# Altium PCB A.SHELESTOV_MOD1.PcbDoc
Units mm, origin at the board's own origin, x right, y up, seen from the top; angles counter-clockwise.
Board outline 152.4 x 101.6 mm, 2 copper layers (Top Layer, Bottom Layer); 118 components, 99 nets, 495 pads, 0 vias.
Unrouted connection lines stored in the file: 263.
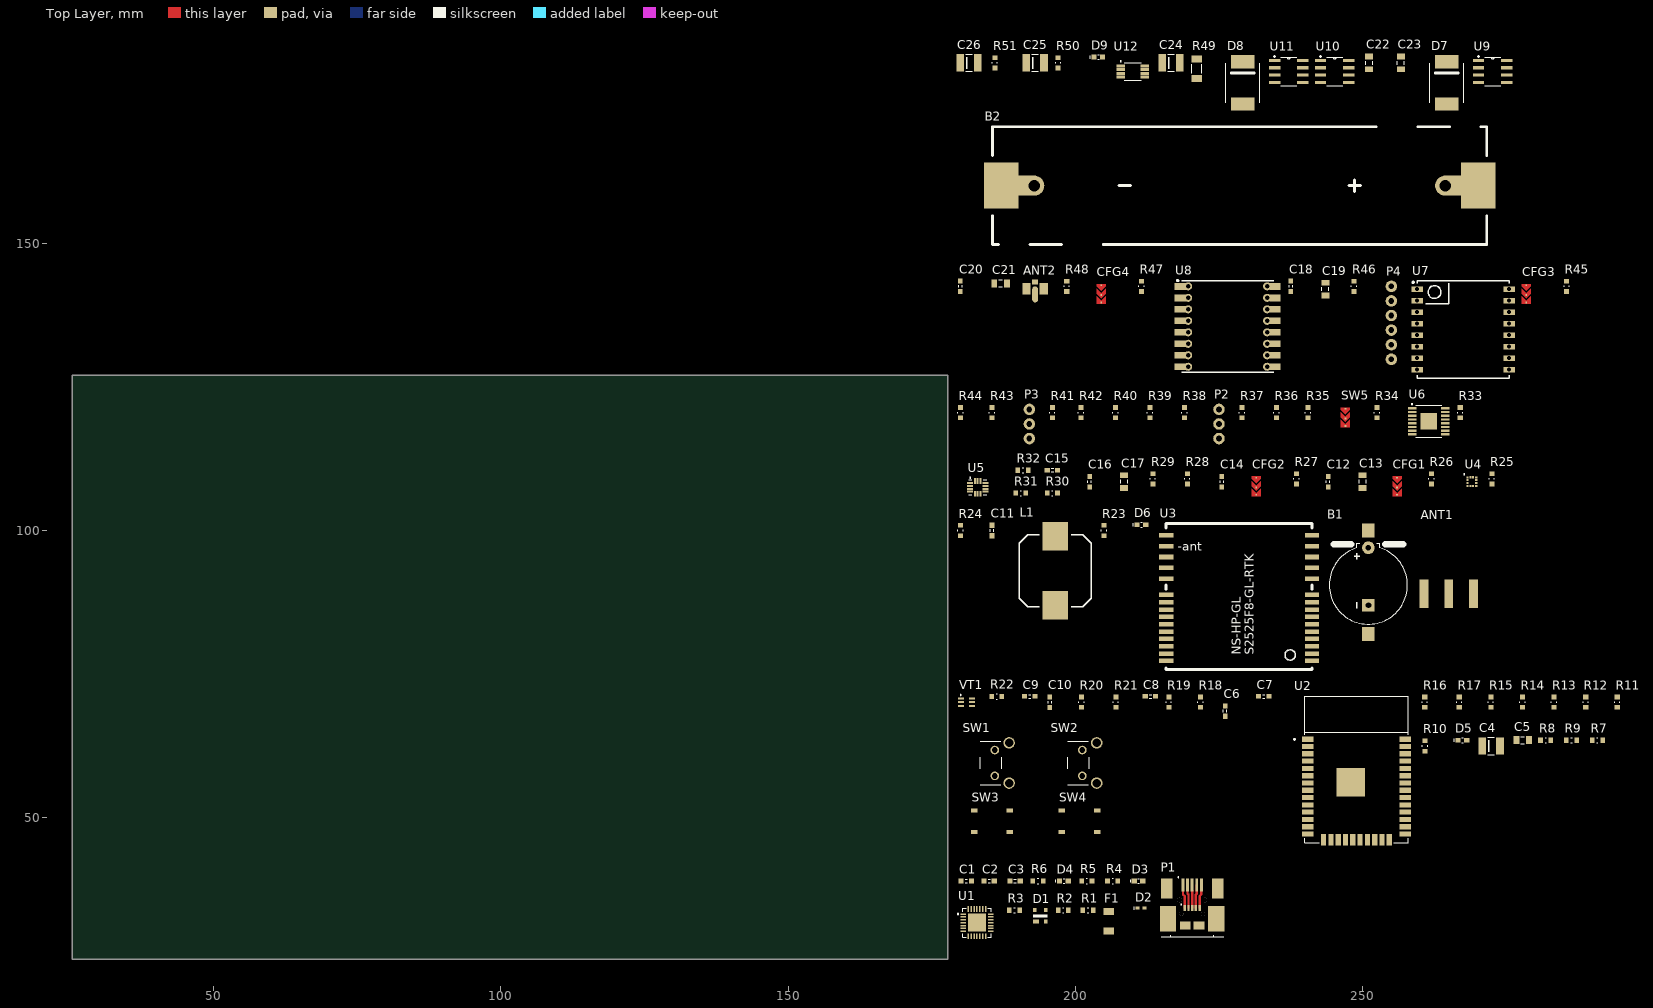
[diagram p0: Top Layer view]
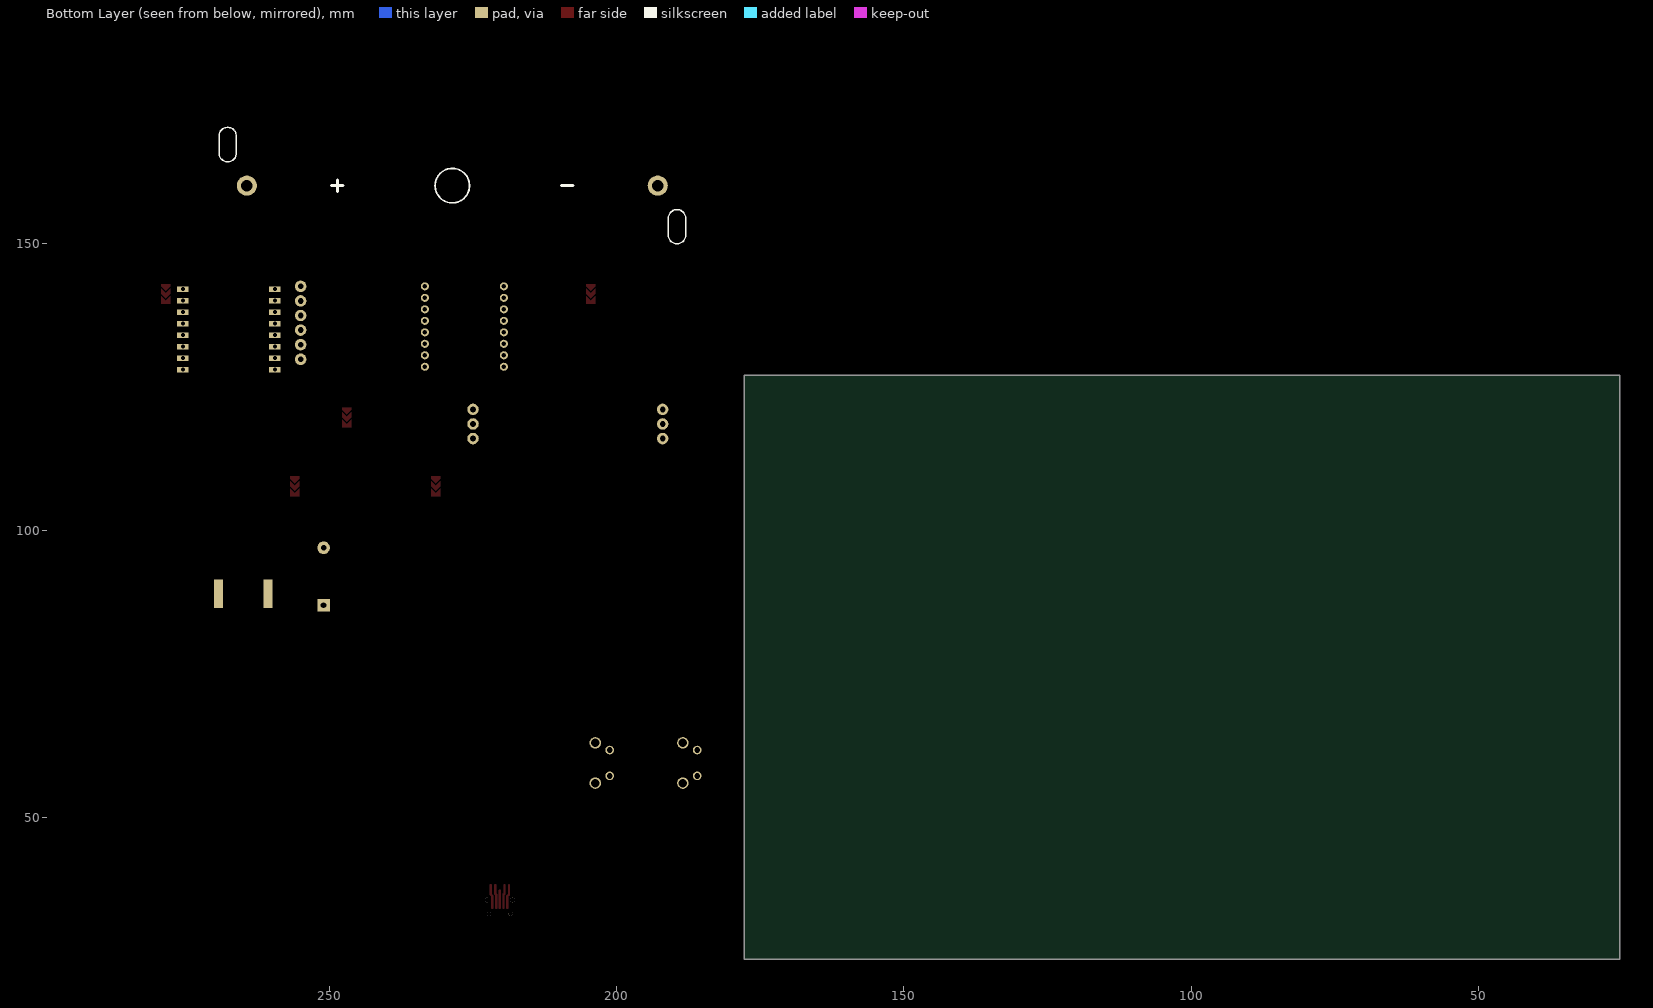
[diagram p1: Bottom Layer view, seen from below]

## Layer stack, top to bottom
Top Solder: solder mask 0.0102, Solder Resist, Dk 3.5
Top Layer: signal copper 0.0356
Dielectric 1: dielectric 0.32, FR-4, Dk 4.8
Bottom Layer: signal copper 0.0356
Bottom Solder: solder mask 0.0102, Solder Resist, Dk 3.5

## Board outline
25.4,25.4 177.8,25.4 177.8,127 25.4,127

## Design rules (kind name [scope] priority, off if disabled: settings)
Clearance [All] p1: gap=0.254 ignorepadtopadclearanceinfootprint=FALSE except(0: Arc-Hole Track-Hole SMDPad-Hole THPad-Hole Via-Hole Fill-Hole Poly-Hole Region-Hole Text-Hole)
PolygonConnect [All] p1: connectstyle=Relief reliefconductorwidth=0.254 reliefentries=4 polygonreliefangle="90 Angle" airgapwidth=0.254
RoomDefinition 07-POWER [InComponentClass('07-POWER')] p1: confinementstyle=ConfineIn formatcopy=TRUE lockcomponents=FALSE outline 179,148 276.86,148 276.86,186.69 179,186.69
RoomDefinition 06-LORA [InComponentClass('06-LORA')] p2: confinementstyle=ConfineIn formatcopy=TRUE lockcomponents=FALSE outline 179,126 289.999,126 289.999,147 179,147
RoomDefinition 05-MUX [InComponentClass('05-MUX')] p3: confinementstyle=ConfineIn formatcopy=TRUE lockcomponents=FALSE outline 179,114.5 271.499,114.5 271.499,125 179,125
RoomDefinition 04-SENSORS [InComponentClass('04-SENSORS')] p4: confinementstyle=ConfineIn formatcopy=TRUE lockcomponents=FALSE outline 179,105.5 276.999,105.5 276.999,113.5 179,113.5
RoomDefinition 03-GPS [InComponentClass('03-GPS')] p5: confinementstyle=ConfineIn formatcopy=TRUE lockcomponents=FALSE outline 179,75 270.499,75 270.499,104.5 179,104.5
RoomDefinition 02-MCU [InComponentClass('02-MCU')] p6: confinementstyle=ConfineIn formatcopy=TRUE lockcomponents=FALSE outline 179.06,44.62 299.72,44.62 299.72,74.62 179.06,74.62
RoomDefinition 01-UART [InComponentClass('01-UART')] p7: confinementstyle=ConfineIn formatcopy=TRUE lockcomponents=FALSE outline 179,27.5 227.33,27.5 227.33,42.5 179,42.5
RoutingVias [All] p1: holewidth=0.711 width=1.27 viastyle="Through Hole" minholewidth=0.711 minwidth=1.27 maxholewidth=0.711 maxwidth=1.27
SolderMaskExpansion [All] p1: expansion=0.102
Width [All] p1: maxlimit=0.254 minlimit=0.254 preferedwidth=0.254
30 further rules are at their usual default settings.

## Classes and differential pairs
component class 07-POWER: B2 C22 C23 C24 C25 C26 D7 D8 D9 R49 R50 R51 U9 U10 U11 U12
component class 06-LORA: ANT2 C18 C19 C20 C21 CFG3 CFG4 P4 R45 R46 R47 R48 U7 U8
component class 05-MUX: P2 P3 R33 R34 R35 R36 R37 R38 R39 R40 R41 R42 R43 R44 SW5 U6
component class 04-SENSORS: C12 C13 C14 C15 C16 C17 CFG1 CFG2 R25 R26 R27 R28 R29 R30 R31 R32 U4 U5
component class 03-GPS: ANT1 B1 C11 D6 L1 R23 R24 U3
component class 02-MCU: C4 C5 C6 C7 C8 C9 C10 D5 R7 R8 R9 R10 R11 R12 R13 R14 R15 R16 R17 R18 R19 R20 R21 R22 SW1 SW2 SW3 SW4 U2 VT1
component class 01-UART: C1 C2 C3 D1 D2 D3 D4 F1 P1 R1 R2 R3 R4 R5 R6 U1

## Components (designator, comment, footprint, x,y, rotation, side; value= is the part's Value field where it differs from the comment)
ANT1 "SMA" SMA-FEMALE-SMT 264.999,91 r0 top
ANT2 "SMA" "U.FL CONNECTOR" 193,142 r0 top
B1 "BAT_GENERAL" BH500-CR1216/20/25-COMB 250.999,92 r90 top
B2 "BAT_GENERAL" 18650-COMBI 228.6,160.02 r180 top
C1 "330nF" C0604 181,39 r0 top
C2 "100nF" C0604 185,39 r0 top
C3 "100nF" C0604 189.5,39 r0 top
C4 "100uF/6v3" CAP_SIZE_B 272.36,62.5 r0 top
C5 "1uF" C0805 277.86,63.5 r0 top
C6 "1nF/50V" C0604 226.06,68.58 r90 top
C7 "1nF/50V" C0604 232.78,71.12 r0 top
C8 "1nF/50V" C0604 213.06,71.12 r0 top
C9 "1nF/50V" C0604 192.06,71.12 r0 top
C10 "1nF/50V" C0604 195.56,70.12 r90 top
C11 "100nF" C0604 185.5,100 r90 top
C12 "100nF" C0604 244,108.5 r90 top
C13 "1uF" C0805 249.999,108.5 r90 top
C14 "100nF" C0604 225.5,108.5 r90 top
C15 "100nF" C0604 196,110.5 r180 top
C16 "100nF" C0604 202.5,108.5 r90 top
C17 "1uF" C0805 208.5,108.5 r90 top
C18 "100nF" C0604 237.5,142.5 r90 top
C19 "1uF" C0805 243.5,142 r90 top
C20 "100nF" C0604 180,142.5 r90 top
C21 "1uF" C0805 187,143 r0 top
C22 "22uF" C0805 251.139,181.39 r90 top
C23 "22uF" C0805 256.639,181.39 r90 top
C24 "10uF" CAP_SIZE_B 216.64,181.39 r0 top
C25 "10uF" CAP_SIZE_B 193,181.39 r0 top
C26 "0.1uF" CAP_SIZE_B 181.5,181.39 r0 top
CFG1 "CFG" CFG_0603 255.999,107.5 r90 top
CFG2 "CFG" CFG_0603 231.5,107.5 r90 top
CFG3 "CFG" CFG_0603 278.499,141 r90 top
CFG4 "CFG" CFG_0603 204.5,141 r90 top
D1 "PRTR5V0U2X,215" SOT143B 193.9,32.92 r0 top
D2 "LED" LED_0402 211.42,34.29 r0 top
D3 "LED" LED_0604 211,39 r0 top
D4 "LED" LED_0604 198,39 r0 top
D5 "LED" LED_0604 267.36,63.5 r0 top
D6 "LED" LED_0604 211.5,101 r0 top
D7 "SMD-DIODE-SCHOTTKY-40V-3A(DO-214AB)" DO-214AB 264.639,177.89 r90 top
D8 "SMD-DIODE-SCHOTTKY-40V-3A(DO-214AB)" DO-214AB 229.139,177.89 r90 top
D9 "LED" LED_0604 204,182.39 r0 top
F1 "FUSE_GENERAL" FUSE_1.8x3.2 206.699,30.42 r90 top
L1 "*" L_SMD 196.5,93 r0 top
P1 "440247-2" CON-U/M_USB-COMBI 220.33,31.29 r0 top
P2 "UART_2.54" UART_2.54 225,116 r0 top
P3 "UART_2.54" UART_2.54 192,116 r0 top
P4 "HEADER 1x6" "HEADER 1x6 2.54" 254.999,142.5 r0 top
R1 "=Value" R0604 202.199,33.92 r0 top
R2 "=Value" R0604 197.9,33.92 r0 top
R3 "=Value" R0604 189.4,33.92 r0 top
R4 "=Value" R0604 206.5,39 r0 top
R5 "=Value" R0604 202,39 r0 top
R6 "=Value" R0604 193.5,39 r0 top
R7 "=Value" R0604 290.86,63.5 r0 top
R8 "=Value" R0604 281.86,63.5 r0 top
R9 "=Value" R0604 286.36,63.5 r0 top
R10 "=Value" R0604 260.86,62.5 r90 top
R11 "=Value" R0604 294.32,70.12 r90 top
R12 "=Value" R0604 288.82,70.12 r90 top
R13 "=Value" R0604 283.32,70.12 r90 top
R14 "=Value" R0604 277.82,70.12 r90 top
R15 "=Value" R0604 272.32,70.12 r90 top
R16 "=Value" R0604 260.82,70.12 r90 top
R17 "=Value" R0604 266.82,70.12 r90 top
R18 "=Value" R0604 221.78,70.12 r90 top
R19 "=Value" R0604 216.28,70.12 r90 top
R20 "=Value" R0604 201.06,70.12 r90 top
R21 "=Value" R0604 207.06,70.12 r90 top
R22 "=Value" R0604 186.32,71.12 r180 top
R23 "=Value" R0604 205,100 r90 top
R24 "=Value" R0604 180,100 r90 top
R25 "=Value" R0604 272.499,109 r90 top
R26 "=Value" R0604 261.999,109 r90 top
R27 "=Value" R0604 238.5,109 r90 top
R28 "=Value" R0604 219.5,109 r90 top
R29 "=Value" R0604 213.5,109 r90 top
R30 "=Value" R0604 196,106.5 r180 top
R31 "=Value" R0604 190.5,106.5 r180 top
R32 "=Value" R0604 190.9,110.5 r180 top
R33 "=Value" R0604 266.999,120.5 r90 top
R34 "=Value" R0604 252.499,120.5 r90 top
R35 "=Value" R0604 240.5,120.5 r90 top
R36 "=Value" R0604 235,120.5 r90 top
R37 "=Value" R0604 229,120.5 r90 top
R38 "=Value" R0604 219,120.5 r90 top
R39 "=Value" R0604 213,120.5 r90 top
R40 "=Value" R0604 207,120.5 r90 top
R41 "=Value" R0604 196,120.5 r90 top
R42 "=Value" R0604 201,120.5 r90 top
R43 "=Value" R0604 185.5,120.5 r90 top
R44 "=Value" R0604 180,120.5 r90 top
R45 "=Value" R0604 285.499,142.5 r90 top
R46 "=Value" R0604 248.5,142.5 r90 top
R47 "=Value" R0604 211.5,142.5 r90 top
R48 "=Value" R0604 198.5,142.5 r90 top
R49 "=Value" R1206 221.14,180.39 r90 top
R50 "=Value" R0604 197,181.39 r90 top
R51 "=Value" R0604 186,181.39 r90 top
SW1 "SWITCH_GEN_2P" SW_GENERIC-SIDE 185.481,59.54 r0 top
SW2 "SWITCH_GEN_2P" SW_GENERIC-SIDE 200.721,59.54 r0 top
SW3 "SWITCH_GEN_4P" SW_4x4x1.5 185.481,49.38 r0 top
SW4 "SWITCH_GEN_4P" SW_4x4x1.5 200.721,49.38 r0 top
SW5 "CFG" CFG_0603 247,119.5 r90 top
U1 "CP2102-GM" QFN50P500X500X100-29N 182.88,31.75 r0 top
U2 "ESP32-WROOM-32D" ESP32-WROOM-32 248.92,58.42 r0 top
U3 "NS-HP-GL" SKYTRAQ-MOD-PCB 228.5,88.5 r0 top
U4 "LIS3MDLTR" VFLGA-12 268.999,108.5 r0 top
U5 "LSM6DSOX" LGA-14L-PQFN50P250X300X86-14N 183,107.5 r0 top
U6 "74HC4052" TSSOP16-SOP65P637X110-17N 261.499,119 r0 top
U7 "RA-02" RA-02 267.499,135 r0 top
U8 "SX1278" SX1278 226.5,135.5 r0 top
U9 "MC33269DG" SO-8-SOIC127P600X175-8N 272.639,179.89 r0 top
U10 "IRF7404PBF" SO-8-SOIC127P600X175-8N 245.139,179.89 r0 top
U11 "IRF7404PBF" SO-8-SOIC127P600X175-8N 237.139,179.89 r0 top
U12 "MCP73843" MSOP-8-SOP65P490X110-8N 210,179.89 r0 top
VT1 "BC847BDW1T1G" SOT363/SOT65P210X110-6N 181.06,70.12 r0 top

## Footprints (in the part's own frame and the unit in brackets; to place one, negate y for a bottom-side part, rotate by r counter-clockwise, add the part's x,y. Pads: shape width x height; smd on the part's side, far side on the other; paste and mask are expansions set on the pad)
18650-COMBI [mm]
  round 1.524 hole 2 slot 5 at 90 deg: MECH(-39.1,-7.15) MECH(39.1,7.15)
  round 1.524 hole 1.8: MECH(-35.85,8) MECH(35.85,-8)
  round 1.524 hole 3.5: MECH(-27.6,-8) MECH(27.6,8)
  round 1.524 hole 4: MECH(0,0)
  round 3.5 hole 2: NEG(35.75,0) POS(-35.75,0)
  rrect100% 8x3.5 smd: NEG(38,0) POS(-38,0)
  rect 6x8 smd: NEG(41.5,0) POS(-41.5,0)
  silkscreen extent -43,-10.25 43,10.25, body extent -42.98,-10.33 43.02,10.33, height 14.96
BH500-CR1216/20/25-COMB [mm]
  round 0.5 hole 1: H(2.5,0)
  rect 2.4x2.2 smd: NEG(-10,0) POS(8,0)
  rect 2.2x2.2 hole 1.016: NEG(-5,0)
  round 2.2 hole 1: POS(5,0)
  silkscreen extent -8.3,-6.8 5.75,6.8, body extent -10.4,-7.35 8.4,7.4, height 4.33
C0604 [mm]
  rect 0.9x0.8 smd: 1(-0.9,0) 2(0.9,0)
  silkscreen extent -0.2,-0.3 0.2,0.3, body extent -0.8,-0.4 0.8,0.4, height 0.8
C0805 [mm]
  rect 1x1.4 smd: 1(-1.1,0) 2(1.1,0)
  silkscreen extent -0.3,-0.6 0.3,0.6, body extent -1,-0.62 1,0.63, height 0.8
CAP_SIZE_B [mm]
  rect 1.34x3.02 smd: 1(-1.54,0) 2(1.54,0)
  silkscreen extent -0.55,-1.5 0.55,1.5, body extent -1.85,-1.5 1.85,1.5, height 2.11
CFG_0603 [mm]
  rect 0.3x0.3 smd: 1(-1.3,0) 2(0,0) 3(1.7,0)
  Top Layer region: -0.6,0 0.2,0.8 1.1,0.8 0.3,0 1.1,-0.8 0.2,-0.8
  Top Layer region: 1.5,0.8 0.7,0 1.5,-0.8 1.9,-0.8 1.9,0.8
  Top Layer region: 2.5,1
  Top Layer region: 1.5,0.5
  Top Layer region: -0.2,0.8 -1.5,0.8 -1.5,-0.8 -0.2,-0.8 -1,0
  Top Layer region: -1,0.5
CON-U/M_USB-COMBI [mm]
  rect 0.5x2.3 smd: 1(-1.6,7) 2(-0.8,7) 3(0,7) 4(0.8,7) 5(1.6,7)
  rect 0.4x1 smd: 1(-1.3,3) 2(-0.65,3) 3(0,3) 4(0.65,3) 5(1.3,3)
  round 0.8 hole 0.9 unplated: None(-2.2,4.4) None(2.2,4.4)
  round 0.7 hole 0.8 unplated: None(-1.88,2) None(1.88,2)
  rect 2x3.5 smd: P1(-4.45,6.4) P2(4.45,6.4)
  rect 2.8x4.5 smd: P4(-4.2,1.15) P5(4.2,1.15)
  rect 1.9x1.4 smd: S5(-1.2,0) S6(1.2,0)
  Top Layer lines w0.4: -1.6,7 -1.6,5.35 -1.3,5.05 -1.3,3.8 -1.3,3 ; -0.8,7 -0.8,5.5 -0.65,5.35 -0.65,3 ; 0,3 0,6 ; 0.65,3 0.65,5.35 0.8,5.5 0.8,7 ; 1.3,3 1.3,3.8 1.3,5.05 1.6,5.35 1.6,7
  silkscreen extent -5.4,-2 5.5,8.42, body extent -4,-2.87 4,2.73, height 2.78
DO-214AB [mil]
  rect 90x160 smd: 1(-145,0) 2(145,0)
  silkscreen extent -135,-115 135,115, body extent -154,-116 154,116, height 98
ESP32-WROOM-32 [mm]
  rect 2x0.9 smd: 1(-8.5,5.26) 2(-8.5,3.99) 3(-8.5,2.72) 4(-8.5,1.45) 5(-8.5,0.18) 6(-8.5,-1.09) 7(-8.5,-2.36) 8(-8.5,-3.63) 9(-8.5,-4.9) 10(-8.5,-6.17) 11(-8.5,-7.44) 12(-8.5,-8.71) 13(-8.5,-9.98) 14(-8.5,-11.25) 25(8.5,-11.25) 26(8.5,-9.98) 27(8.5,-8.71) 28(8.5,-7.44) 29(8.5,-6.17) 30(8.5,-4.9) 31(8.5,-3.63) 32(8.5,-2.36) 33(8.5,-1.09) 34(8.5,0.18) 35(8.5,1.45) 36(8.5,2.72) 37(8.5,3.99) 38(8.5,5.26)
  rect 0.9x2 smd: 15(-5.715,-12.25) 16(-4.445,-12.25) 17(-3.175,-12.25) 18(-1.905,-12.25) 19(-0.635,-12.25) 20(0.635,-12.25) 21(1.905,-12.25) 22(3.175,-12.25) 23(4.445,-12.25) 24(5.715,-12.25)
  rect 5x5 smd: 39(-1,-2.24)
  silkscreen extent -10.88,-12.75 9,12.75, body extent -9.05,-12.78 9.02,12.76, height 3.1
FUSE_1.8x3.2 [mm]
  rect 1.2x1.8 smd: 1(-0.1,0.9) 2(3.3,0.9)
  body extent 0,0 3.2,1.8, height 0.8
"HEADER 1x6 2.54" [mm]
  round 2 hole 1: 1(0,0) 2(0,-2.54) 3(0,-5.08) 4(0,-7.62) 5(0,-10.16) 6(0,-12.7)
L_SMD [mm]
  rect 4.5x5 smd: 1(0,-6) 2(0,6)
  silkscreen extent -6.25,-6.25 6.25,6.25, body extent -6.25,-6.25 6.25,6.25, height 7
LED_0402 [mm]
  rect 0.7x0.5 smd: A(0.6,0) C(-0.6,0)
  silkscreen extent -1.2,-0.25 -1.2,0.25, body extent -0.5,-0.25 0.51,0.25, height 0.45
LED_0604 [mm]
  rect 0.91x0.83 smd: A(0.75,0) C(-0.75,0)
  silkscreen extent -1.4,-0.4 0.14,0.4, body extent -0.81,-0.4 0.81,0.4, height 0.6
LGA-14L-PQFN50P250X300X86-14N [mm]
  rect 1.01x0.35 smd: 1(-1.36,0.75) 2(-1.36,0.25) 3(-1.36,-0.25) 4(-1.36,-0.75) 8(1.36,-0.75) 9(1.36,-0.25) 10(1.36,0.25) 11(1.36,0.75)
  rect 0.35x1.01 smd: 5(-0.5,-1.11) 6(0,-1.11) 7(0.5,-1.11) 12(0.5,1.11) 13(0,1.11) 14(-0.5,1.11)
  silkscreen extent -1.55,-1.3 1.55,1.8, body extent -1.5,-1.25 1.5,1.25, height 0.87
MSOP-8-SOP65P490X110-8N [mm]
  rect 1.5x0.49 smd: 1(-2.105,0.975) 2(-2.105,0.325) 3(-2.105,-0.325) 4(-2.105,-0.975) 5(2.105,-0.975) 6(2.105,-0.325) 7(2.105,0.325) 8(2.105,0.975)
  silkscreen extent -2.2,-1.53 1.5,1.9, body extent -2.5,-1.5 2.5,1.5, height 0.92
QFN50P500X500X100-29N [mm]
  rect 0.97x0.26 smd: 1(-2.37,1.5) 2(-2.37,1) 3(-2.37,0.5) 4(-2.37,0) 5(-2.37,-0.5) 6(-2.37,-1) 7(-2.37,-1.5) 15(2.37,-1.5) 16(2.37,-1) 17(2.37,-0.5) 18(2.37,0) 19(2.37,0.5) 20(2.37,1) 21(2.37,1.5)
  rect 0.26x0.97 smd: 8(-1.5,-2.37) 9(-1,-2.37) 10(-0.5,-2.37) 11(0,-2.37) 12(0.5,-2.37) 13(1,-2.37) 14(1.5,-2.37) 22(1.5,2.37) 23(1,2.37) 24(0.5,2.37) 25(0,2.37) 26(-0.5,2.37) 27(-1,2.37) 28(-1.5,2.37)
  rect 3.15x3.15 smd: 29(0,0)
  silkscreen extent -3.4,-2.5 2.5,2.5, body extent -2.5,-2.5 2.5,2.5, height 1.1
R0604 [mm]
  rect 0.8x0.9 smd: 1(-0.9,0) 2(0.9,0)
  silkscreen extent -0.1,-0.45 0.1,0.45, body extent -0.8,-0.4 0.8,0.4, height 0.45
R1206 [mm]
  rect 1.2x1.8 smd: 1(-1.7,0) 2(1.7,0)
  silkscreen extent -0.8,-0.85 0.8,0.85, body extent -1.6,-0.8 1.6,0.8, height 0.6
RA-02 [mm]
  rect 2x1 hole 0.7: 1(-8,7) 2(-8,5) 3(-8,3) 4(-8,1) 5(-8,-1) 6(-8,-3) 7(-8,-5) 8(-8,-7) 9(8,-7) 10(8,-5) 11(8,-3) 12(8,-1) 13(8,1) 14(8,3) 15(8,5) 16(8,7)
  silkscreen extent -8.8,-8.5 8,8.5, body extent -8,-8.5 8,8.5, height 3.2
SKYTRAQ-MOD-PCB [mm] "SkyTraq module S2525-F8-GL/NS-HP-GL[-5/-10]"
  rect 2.5x0.8 smd: 1(12.7,-11.2) 2(12.7,-9.923) 3(12.7,-8.646) 4(12.7,-7.369) 5(12.7,-6.092) 6(12.7,-4.815) 7(12.7,-3.538) 8(12.7,-2.261) 9(12.7,-0.984) 10(12.7,0.293) 11(12.7,3.093) 12(12.7,4.993) 13(12.7,6.893) 14(12.7,8.793) 15(12.7,10.693) 16(-12.7,10.693) 17(-12.7,8.793) 18(-12.7,6.893) 19(-12.7,4.993) 20(-12.7,3.093) 21(-12.7,0.293) 22(-12.7,-0.984) 23(-12.7,-2.261) 24(-12.7,-3.538) 25(-12.7,-4.815) 26(-12.7,-6.092) 27(-12.7,-7.369) 28(-12.7,-8.646) 29(-12.7,-9.923) 30(-12.7,-11.2)
  silkscreen extent -12.7,-12.7 12.7,12.7, body extent -12.7,-12.7 12.7,12.7, height 12.56
SMA-FEMALE-SMT [mm]
  rect 1.524x5 smd: ANT(0,-2) GND(-4.3,-2) GND(4.3,-2)
  rect 1.524x5 smd far side: GND(-4.3,-2) GND(4.3,-2)
  body extent -4.76,-4.08 4.76,10.2, height 4.37
SO-8-SOIC127P600X175-8N [mil]
  rect 78x22 smd: 1(-97,75) 2(-97,25) 3(-97,-25) 4(-97,-75) 5(97,-75) 6(97,-25) 7(97,25) 8(97,75)
  silkscreen extent -101,-98 54,106, body extent -118,-97 118,97, height 66
SOT143B [mm]
  rect 1x0.7 smd: 1(-0.75,-1)
  rect 0.6x0.7 smd: 2(0.95,-1) 3(0.95,1) 4(-0.95,1)
  silkscreen extent -1.27,-0.25 1.27,0.25, body extent -1.45,-1.18 1.45,1.18, height 1.22
SOT363/SOT65P210X110-6N [mm]
  rect 1.02x0.36 smd: 1(-0.955,0.65) 2(-0.955,0) 3(-0.955,-0.65) 4(0.955,-0.65) 5(0.955,0) 6(0.955,0.65)
  silkscreen extent -1.1,1.15 -0.9,1.35, body extent -1.15,-1.05 1.15,1.05, height 1
SW_4x4x1.5 [mm]
  rect 1.1x0.7 smd: 1(-3.1,-1.85) 2(3.1,-1.85) 3(-3.1,1.85) 4(3.1,1.85)
  body extent -3.2,-2.65 3.2,2.65, height 1.55
SW_GENERIC-SIDE [mm]
  round 1.5 hole 1: 1(0.5,-2.25) 2(0.5,2.25)
  round 2 hole 1.5: SHIELD(3,-3.5) SHIELD(3,3.5)
  silkscreen extent -2,-3.75 1.7,3.75, body extent -5.3,-4.25 4.6,4.25, height 7.5
SX1278 [mm]
  rect 2x1.2 smd: 1(-8.25,7) 2(-8.25,5) 3(-8.25,3) 4(-8.25,1) 5(-8.25,-1) 6(-8.25,-3) 7(-8.25,-5) 8(-8.25,-7) 9(8.25,-7) 10(8.25,-5) 11(8.25,-3) 12(8.25,-1) 13(8.25,1) 14(8.25,3) 15(8.25,5) 16(8.25,7)
  round 1.4 hole 0.8: 1(-6.875,7) 2(-6.875,5) 3(-6.875,3) 4(-6.875,1) 5(-6.875,-1) 6(-6.875,-3) 7(-6.875,-5) 8(-6.875,-7) 9(6.875,-7) 10(6.875,-5) 11(6.875,-3) 12(6.875,-1) 13(6.875,1) 14(6.875,3) 15(6.875,5) 16(6.875,7)
  silkscreen extent -8.8,-8 8,8.1, body extent -8,-7.95 8,7.95, height 2.29
TSSOP16-SOP65P637X110-17N [mm]
  rect 1.48x0.41 smd: 1(-2.875,2.275) 2(-2.875,1.625) 3(-2.875,0.975) 4(-2.875,0.325) 5(-2.875,-0.325) 6(-2.875,-0.975) 7(-2.875,-1.625) 8(-2.875,-2.275) 9(2.875,-2.275) 10(2.875,-1.625) 11(2.875,-0.975) 12(2.875,-0.325) 13(2.875,0.325) 14(2.875,0.975) 15(2.875,1.625) 16(2.875,2.275)
  rect 2.85x2.85 smd: 17(0,0)
  silkscreen extent -3,-2.8 2.25,3.1, body extent -3.2,-2.5 3.2,2.5, height 1.1
"U.FL CONNECTOR" [mm]
  rrect100% 1x2.8 smd: ANT(0,-0.9)
  rect 1.4x2 smd: GND(-1.5,0.05) GND(1.5,0.05)
  rect 1x0.9 smd: GND(0,1.25)
  body extent -1.5,-1.55 1.5,1.55, height 1.4
UART_2.54 [mm]
  round 2 hole 1: 1(0,5.08) 2(0,2.54) 3(0,0)
VFLGA-12 [mm]
  rect 0.375x0.35 smd: 1(-0.763,0.75) 2(-0.763,0.25) 3(-0.763,-0.25) 4(-0.763,-0.75) 7(0.763,-0.75) 8(0.763,-0.25) 9(0.763,0.25) 10(0.763,0.75)
  rect 0.35x0.375 smd: 5(-0.25,-0.763) 6(0.25,-0.763) 11(0.25,0.763) 12(-0.25,0.763)
  silkscreen extent -1.4,1.2 -1.2,1.4, body extent -1,-1 1,1, height 0.95

## Part data
ANT1 ANT2: library part ANT-GENERAL, "Generic SMA connector with 5 pins"
B1 B2: "Coin Cell Battery 3V 12 X 2.5 mm 48mA", Package="Panasonic Battery", Availability=Unavailable, MF="Panasonic Battery", MP=BR1225, Price=None, SnapEDA_Link=https://www.snapeda.com/parts/BR1225/Panasonic/view-part/?ref=snap
  B2: Size=18650
C1 C2 C3 C5 C6 C7 C8 C9 C10 C11 C12 C13 C14 C15 C16 C17 C18 C19 C20 C21 C22 C23: library part C_GEN_NONPOL, "General capacitor"
  C1: Capacity=330nF, Size=0805
  C2 C3 C11 C12 C14 C15 C16 C18 C20: Capacity=100nF, Size=0604
  C5 C13 C17 C19 C21: Capacity=1uF, Size=0805
  C6 C7 C8 C9 C10: Capacity=1nF/50V, Size=0604
  C22 C23: Capacity=22uF, Size=0805
C4 C24 C25 C26: library part C_GEN_POL_, "General capacitor"
  C4: Capacity=100uF/6v3, Size="SIZE B"
  C24 C25: Capacity=10uF, Size=B
  C26: Capacity=0.1uF, Size=B
D1: "PRTR5V0U2X - Ultra low capacitance double rail-to-rail ESD protection diode", Package="SOT-143 Nexperia", Availability=Unavailable, MF="Nexperia USA", MP=PRTR5V0U2X,215, Price=None, SnapEDA_Link=https://www.snapeda.com/parts/PRTR5V0U2X%2C215/Nexperia%20USA%20Inc./view-part/?ref=snap
D2 D3 D4 D5 D6 D9: "Led General", Package="0805 Dialight", Availability=Unavailable, MF=Dialight, MP=598-8140-107F, Price=None, SnapEDA_Link=https://www.snapeda.com/parts/598-8140-107F/Dialight/view-part/?ref=snap
D7 D8: "Rectifier, Schottky; DO-214AB; 3.0A IF; 0.75V; 40V; 100A IFRM; 10000V/us; 1000pF", Package="DO-214 Vishay", Availability=Good, MF=Vishay, MP=SS34-E3/57T, Name=SS34, Price="0.33 USD", SnapEDA_Link=https://www.snapeda.com/symbols-footprints/SS34-E3/57T/Vishay%20Semiconductor%20Diodes%20Division/view-part/?ref=snap
L1: library part L_GENERAL, "Inductor Generic", Inductivity=100nH, Size=0805
P1: library part CON-USB-Micro/Mini, "Mini/Micro USB B Type RCPT", Package=None, Availability=Unavailable, MF="TE Connectivity", MP=440247-2, Price=None, SnapEDA_Link=https://www.snapeda.com/parts/440247-2/TE%20Connectivity%20AMP%20Connectors/view-part/?ref=snap, TE_purchase_URL=https://www.te.com/usa-en/product-440247-2.html?te_bu=Cor&te_type=disp&te_campaign=seda_glo_cor-seda-global-disp-prtnr-fy19-seda-model-bom-cta_sma-317_1&elqCampaignId=32493
R1 R2 R33 R34 R35 R37 R38 R39 R41 R43: library part R_GENERAL, "Resistor General", Resistance=51R, Size=0603
R3: library part R_GENERAL, "Resistor General", Resistance=5K, Size=0603
R4 R5 R6 R10 R23 R50: library part R_GENERAL, "Resistor General", Resistance=470R, Size=0603
R7 R11 R12 R13 R14 R15 R24 R29 R31 R44: library part R_GENERAL, "Resistor General", Resistance=0
  R24 R29 R31 R44: Size=0603
R8 R9 R25 R26 R27 R28 R30 R32: library part R_GENERAL, "Resistor General", Resistance=4K7, Size=0603
R16 R17 R18 R19 R22: library part R_GENERAL, "Resistor General", Resistance=12K, Size=0603
R20 R21: library part R_GENERAL, "Resistor General", Resistance=470, Size=0603
R36 R40 R45 R46 R47 R48: library part R_GENERAL, "Resistor General", Resistance=10K, Size=0603
R42: library part R_GENERAL, "Resistor General", Resistance=0R, Size=0603
R49: library part R_GENERAL, "Resistor General", Resistance=100m, Size=1206
R51: library part R_GENERAL, "Resistor General", Resistance=100K, Size=0603
SW1 SW2 SW3 SW4: "SWITCH DIP 4.3 mm"
U1: "SINGLE-CHIP USB-TO-UART BRIDGE", Package="VFQFN-28 Vishay Siliconix", Availability=Unavailable, MF="Silicon Labs", MP=CP2102GM, Price=None, SnapEDA_Link=https://www.snapeda.com/parts/CP2102GM/Silicon%20Labs/view-part/?ref=snap
U2: "IC: SoC; GPIO, I2C, I2S, IR, SD, SDIO, SPI, UART; 2.7÷3.6VDC; 20dBm", Package="Module Espressif Systems", Availability=Unavailable, MF="Espressif Systems", MP=ESP32-WROOM-32D, Price=None, SnapEDA_Link=https://www.snapeda.com/parts/ESP32-WROOM-32D/Espressif%20Systems/view-part/?ref=snap
U3: "NS-HP-GL / S2525F8-GL-RTK in SMD"
U4: "LIS3MDL Series 3 Axis ±2/±8/±12/±16 g 3.6V High Performance Magnetometer LGA-12", Package="VFLGA-12 STMicroelectronics", Availability=Unavailable, MF=STMicroelectronics, MP=LIS3MDLTR, Price=None, SnapEDA_Link=https://www.snapeda.com/parts/LIS3MDLTR/STMicroelectronics/view-part/?ref=snap
U6: "Dual 4-channel analog multiplexer/demultiplexer", Package=TSSOP-16, Availability=Unavailable, MF=NXP, MP=74HC4052PW, Price=None
U7: "RA-02 LoRa modem by Ai-Thinker"
U8: "SX1278 LoRa modem"
U9: "MC33269 Series 800 mA Adjustable Output SMT LDO Voltage Regulator - SOIC-8", Package="SOIC-8 ON Semiconductor", Availability=Unavailable, MF="ON Semiconductor", MP=MC33269DG, Price=None, SnapEDA_Link=https://www.snapeda.com/parts/MC33269DG/ON%20Semiconductor/view-part/?ref=snap
U12: "MCP73843 Single Li-ion cell charger IC", Package="SOIC-8 ON Semiconductor", Availability=Unavailable, MF=Microchip, MP=MCP73843, Price=None

## Nets (pads, with @x,y where several pads share a name; then routed paths per layer and width w, separated by ;. In a path a pad name is that pad's centre, name@x,y a point inside that pad or via, vN(x,y) a via of type N, cw(c..) or ccw(c..) an arc to the next point about the centre after c; other vN are vias at no path point)
3V3: C4.1 C5.2 C12.1 C13.2 C15.1 C16.1 C17.2 C18.1 C19.2 C20.1 C21.2 C23.2 D6.A L1.2 R8.1 R9.1 R16.1 R17.1 R19.1 R25.1 R27.1 R28.1 R29.2 R30.1 R36.1 R45.1 R47.1 U2.2 U3.1 U3.25 U4.5 U4.6 U5.5 U5.8 U5.11 U6.16 U6.17 U7.3 U8.13 U9.2 U9.3 U9.6 U9.7
5V: C1.2 C2.2 D7.1 D8.1 F1.2 U1.7 U1.8 U10.4
CP_LDO: C3.2 R3.2 U1.6
EN: C8.2 R19.2 R21.2 U2.3 VT1.3
GND: B1.NEG B2.NEG C1.1 C2.1 C3.1 C4.2 C5.1 C6.1 C7.1 C8.1 C9.1 C10.1 C12.2 C13.1 C14.1 C15.2 C16.2 C17.1 C18.2 C19.1 C20.2 C21.1 C22.1 C23.1 C24.2 C26.2 D1.1 P1.5 P2.3 P3.3 R6.2 R24.2 R26.2 R32.2 R40.2 R44.1 R46.2 R48.2 SW1.1 SW2.1 SW3.1 SW3.3 SW4.1 SW4.3 U1.3 U1.29 U2.1 U2.15 U2.38 U2.39 U3.2 U3.30 U4.2 U4.3 U4.10 U4.12 U5.6 U5.7 U6.8 U7.1 U7.2 U7.9 U7.16 U8.1 U8.8 U8.10 U9.1 U12.5
GPS_ANT: ANT1.ANT U3.17
GPS_VBAT: B1.POS U3.21
IO0: R20.2 U2.25 VT1.6
IO5: C6.2 R16.2 SW1.2 U2.29
IO18: U2.30
IO21: C7.2 R17.2 SW2.2
LIS_ADDR: R25.2 R26.1 U4.9
LSM_ADDR: R30.2 R32.1
LSM_MDRDY: R31.2 U4.8
LSM_SCL: CFG1.1 R27.2
LSM_SDA: CFG2.1 R28.2
NetB2_POS: B2.POS C25.1 U10.5 U10.6 U10.7 U10.8 U11.5 U11.6 U11.7 U11.8 U12.7
NetC9_2: C9.2 R20.1 SW3.2 SW3.4
NetC10_2: C10.2 R21.1 SW4.2 SW4.4
NetC14_2: C14.2 U4.4
NetC22_2: C22.2 D7.2 U9.4 U10.1 U10.2 U10.3
NetC24_1: C24.1 D8.2 R49.1 R50.1 R51.1 U12.2
NetC25_2: C25.2 C26.1 U12.6
NetCFG1_2: CFG1.2 U4.1
NetCFG2_2: CFG2.2 U4.11
NetCFG3_2: CFG3.2 U7.15
NetCFG3_3: CFG3.3 R45.2 R46.1
NetCFG4_2: CFG4.2 U8.5
NetCFG4_3: CFG4.3 R47.2 R48.1
NetD1_2: D1.2 P1.2 R1.2
NetD1_3: D1.3 P1.3 R2.2
NetD1_4: D1.4 F1.1 P1.1
NetD2_C: D2.C R4.1
NetD3_C: D3.C R5.2
NetD4_A: D4.A U1.11
NetD4_C: D4.C R6.1
NetD6_C: D6.C R23.2
NetD9_A: D9.A R50.2
NetD9_C: D9.C U12.3
NetP2_1: P2.1 R38.2
NetP2_2: P2.2 R39.2 R42.1
NetP3_1: P3.1 R41.2
NetP3_2: P3.2 R43.2
NetR3_1: R3.1 U1.9
NetR7_2: R7.2 R23.1 U3.10
NetR11_1: R11.1 U2.14
NetR12_1: R12.1 U2.16
NetR13_1: R13.1 U2.13
NetR14_2: R14.2 U2.35
NetR15_2: R15.2 U2.34
NetR18_1: R18.1 VT1.5
NetR18_2: R18.2 U1.28 VT1.1
NetR22_1: R22.1 VT1.2
NetR22_2: R22.2 U1.24 VT1.4
NetR29_1: R29.1 U5.12
NetR31_1: R31.1 U5.9
NetR33_1: R33.1 U6.12
NetR33_2: R33.2 U3.4
NetR34_1: R34.1 U6.1
NetR34_2: R34.2 SW5.1 U3.5
NetR35_1: R35.1 U6.14
NetR35_2: R35.2 U3.7
NetR36_2: R36.2 R40.1 U6.6
NetR37_1: R37.1 U6.5
NetR37_2: R37.2 U3.6
NetR38_1: R38.1 U6.15
NetR39_1: R39.1 U6.2
NetR41_1: R41.1 U6.11
NetR42_2: R42.2 U3.23
NetR43_1: R43.1 U6.4
NetR44_2: R44.2 U6.7
NetR49_2: R49.2 U11.1 U11.2 U11.3 U12.1
NetR51_2: R51.2 U12.4
NetSW5_2: SW5.2 U2.28
NetSW5_3: SW5.3 U6.3
NetU2_27: U2.27 U6.13
NetU4_7: U4.7
NetU5_4: U5.4
NetU11_4: U11.4 U12.8
RF_DIO0: P4.1
RF_DIO1: P4.2
RF_DIO2: P4.3
RF_DIO3: P4.4
RF_DIO4: P4.5
RF_DIO5: P4.6
RF_MISO: R11.2
RF_MOSI: R12.2
RF_NSS: CFG3.1 CFG4.1
RF_SCK: R13.2
RFGND: ANT1.GND ANT2.GND C11.1 R24.1 U3.11 U3.12 U3.16 U3.18
RFVCC: C11.2 L1.1 U3.19 U3.20
SCL: CFG1.3 R9.2 U2.36
SDA: CFG2.3 R8.2 U2.33
SXANT: ANT2.ANT
USB-DN: R1.1 U1.4
USB-DP: R2.1 U1.5
UUART_RX: D3.A R14.1 U1.25
UUART_TX: D2.A R15.1 U1.26
VCC: R4.2 R5.1
pads on no net: B1.H B2.MECH D5.A D5.C P1.4 P1.None P1.P1 P1.P2 P1.P4 P1.P5 P1.S5 P1.S6 R7.1 R10.1 R10.2 SW1.SHIELD SW2.SHIELD U1.1 U1.2 U1.10 U1.12 U1.13 U1.14 U1.15 U1.16 U1.17 U1.18 U1.19 U1.20 U1.21 U1.22 U1.23 U1.27 U2.4 U2.5 U2.6 U2.7 U2.8 U2.9 U2.10 U2.11 U2.12 U2.17 U2.18 U2.19 U2.20 U2.21 U2.22 U2.23 U2.24 U2.26 U2.31 U2.32 U2.37 U3.3 U3.8 U3.9 U3.13 U3.14 U3.15 U3.22 U3.24 U3.26 U3.27 U3.28 U3.29 U5.1 U5.2 U5.3 U5.10 U5.13 U5.14 U6.9 U6.10 U7.4 U7.5 U7.6 U7.7 U7.8 U7.10 U7.11 U7.12 U7.13 U7.14 U8.2 U8.3 U8.4 U8.6 U8.7 U8.9 U8.11 U8.12 U8.14 U8.15 U8.16 U9.5 U9.8

## Text inside footprints (layer, text, board x,y; h text height)
U2: Mechanical 4 "ANTENNA" at 243.195,66.821 h1.88; Mechanical 4 "ANTENNA" at 243.195,66.821 h1.88
U3: Top Overlay "-ant" at 217.832,96.501 h1.52; Top Overlay "NS-HP-GL / S2525F8-GL-RTK" at 231.04,78.34 h1.52 r90